# Altium PCB B293A MiRLIN Integrated PIC32.PcbDoc (part 1 of 3)
Units mm, origin at the board's own origin, x right, y up, seen from the top; angles counter-clockwise.
Board outline 134.25 x 90.25 mm, 4 copper layers (Component Side, Ground Plane, Power Plane, Solder Side), stack 0.651 mm thick; 223 components, 154 nets, 813 pads, 160 vias.
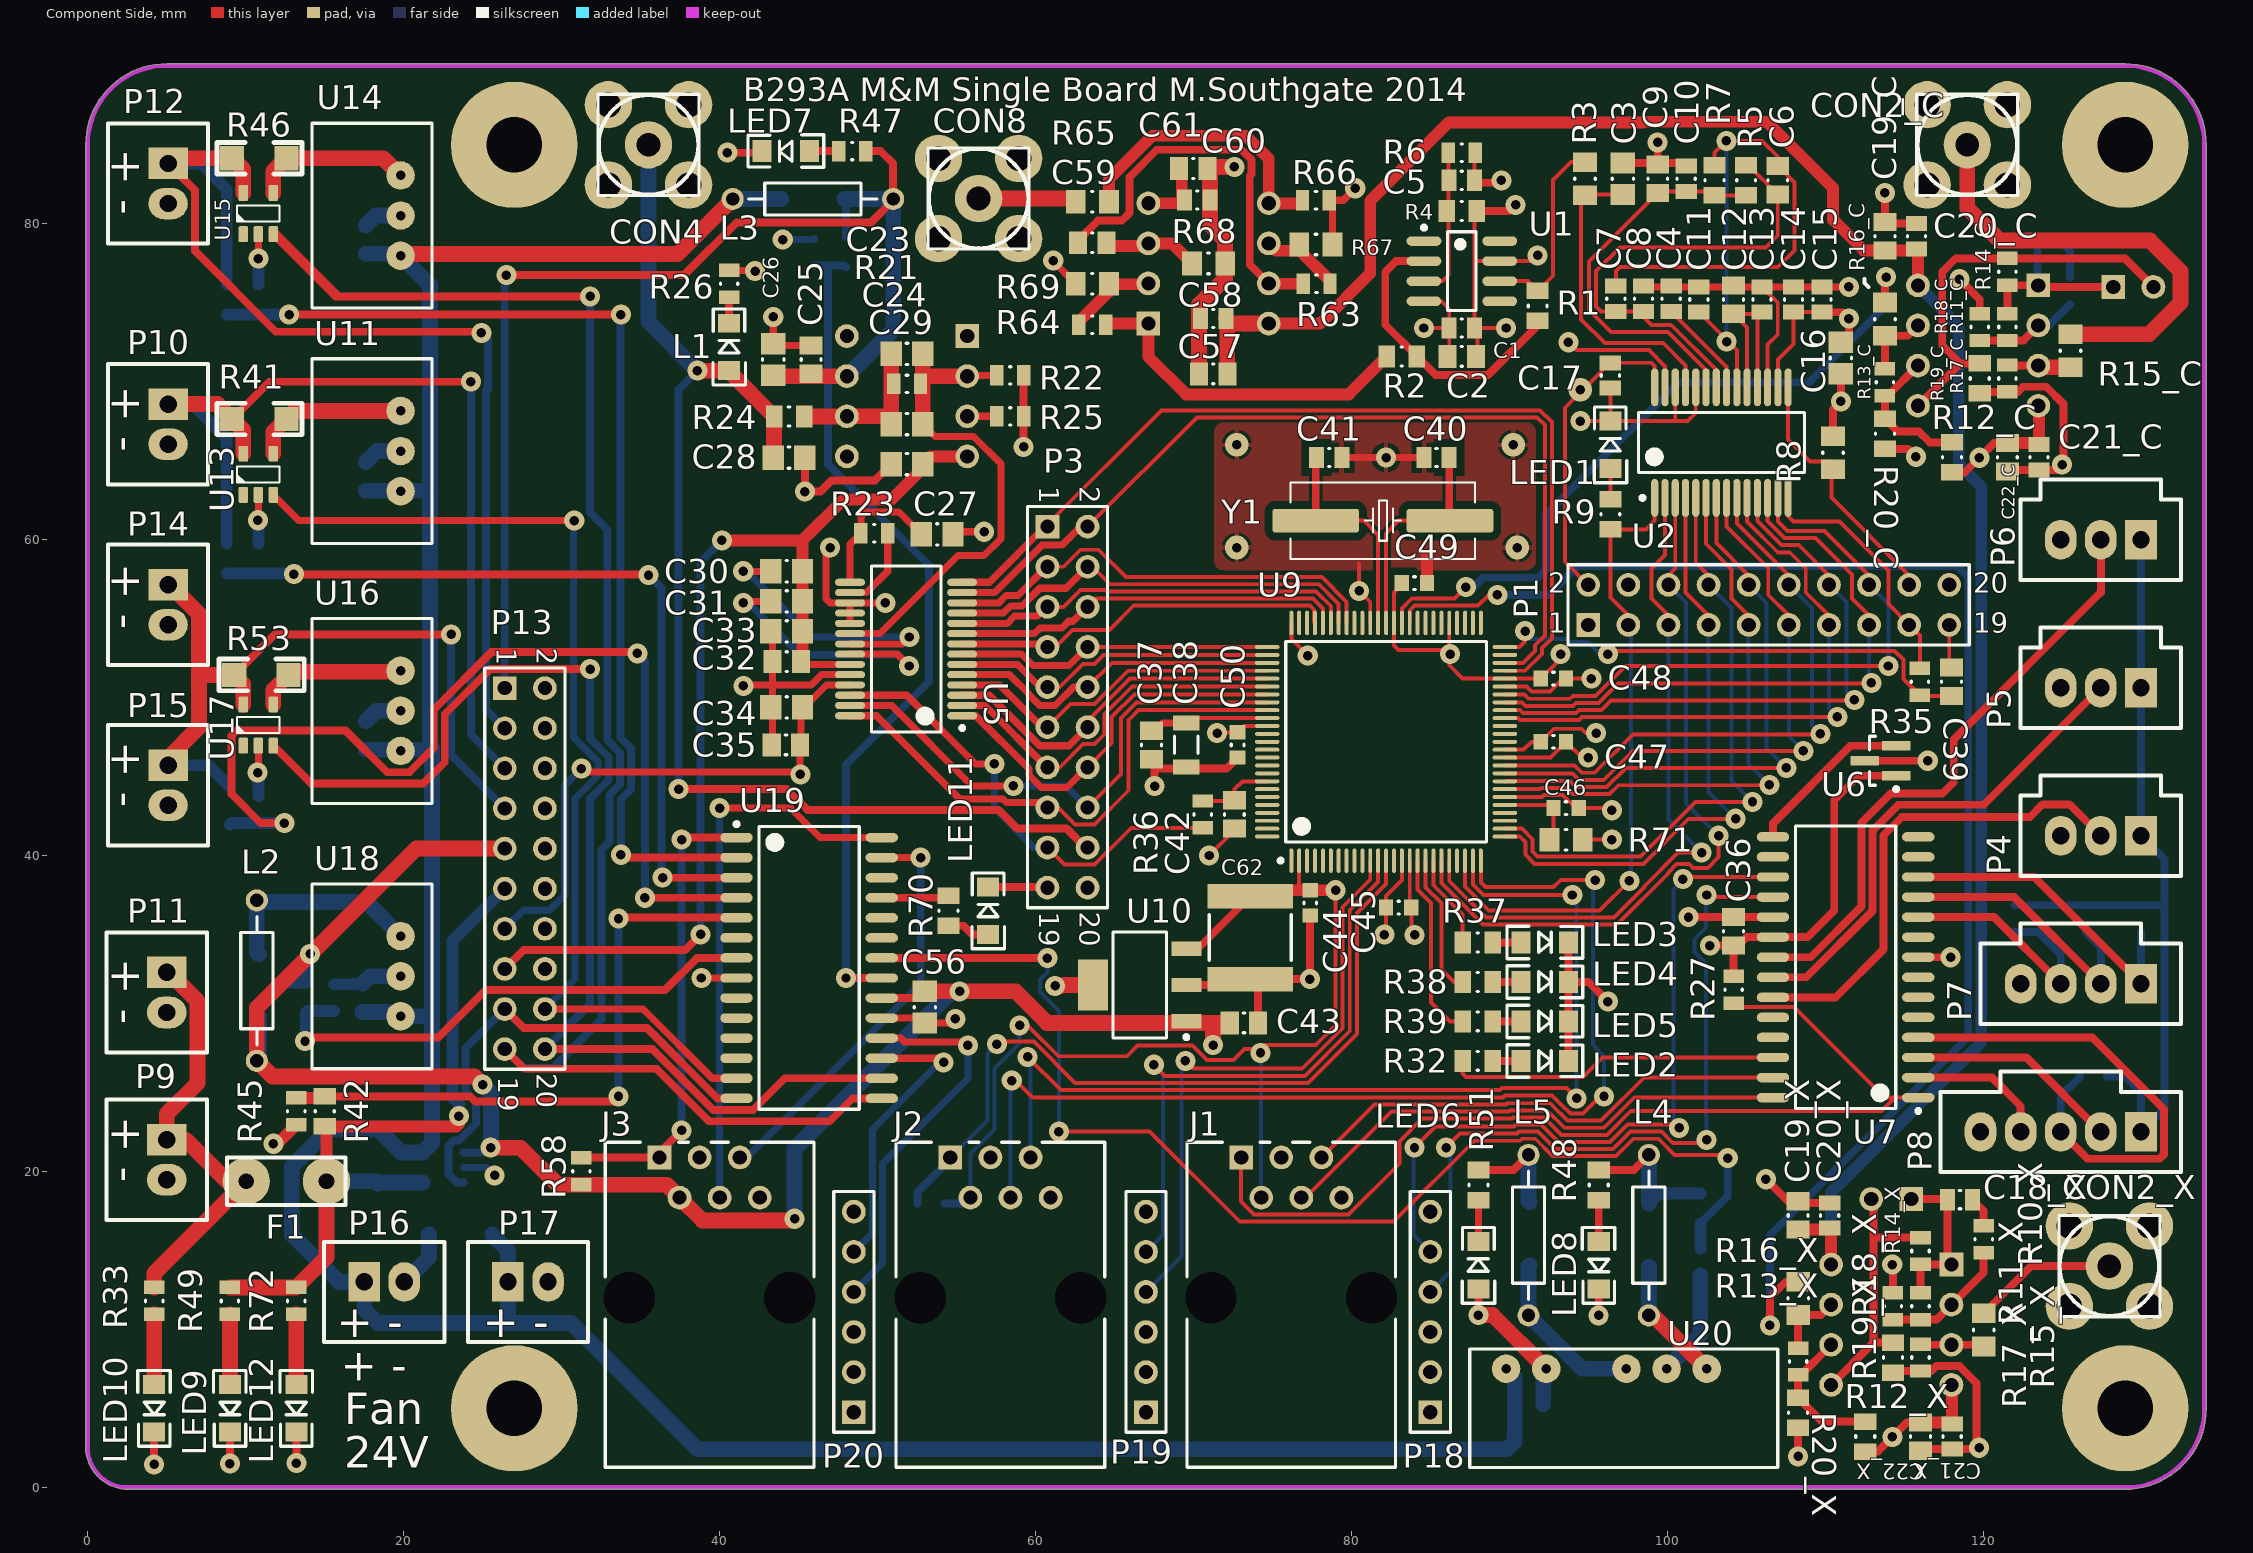
[diagram p0: Component Side view]
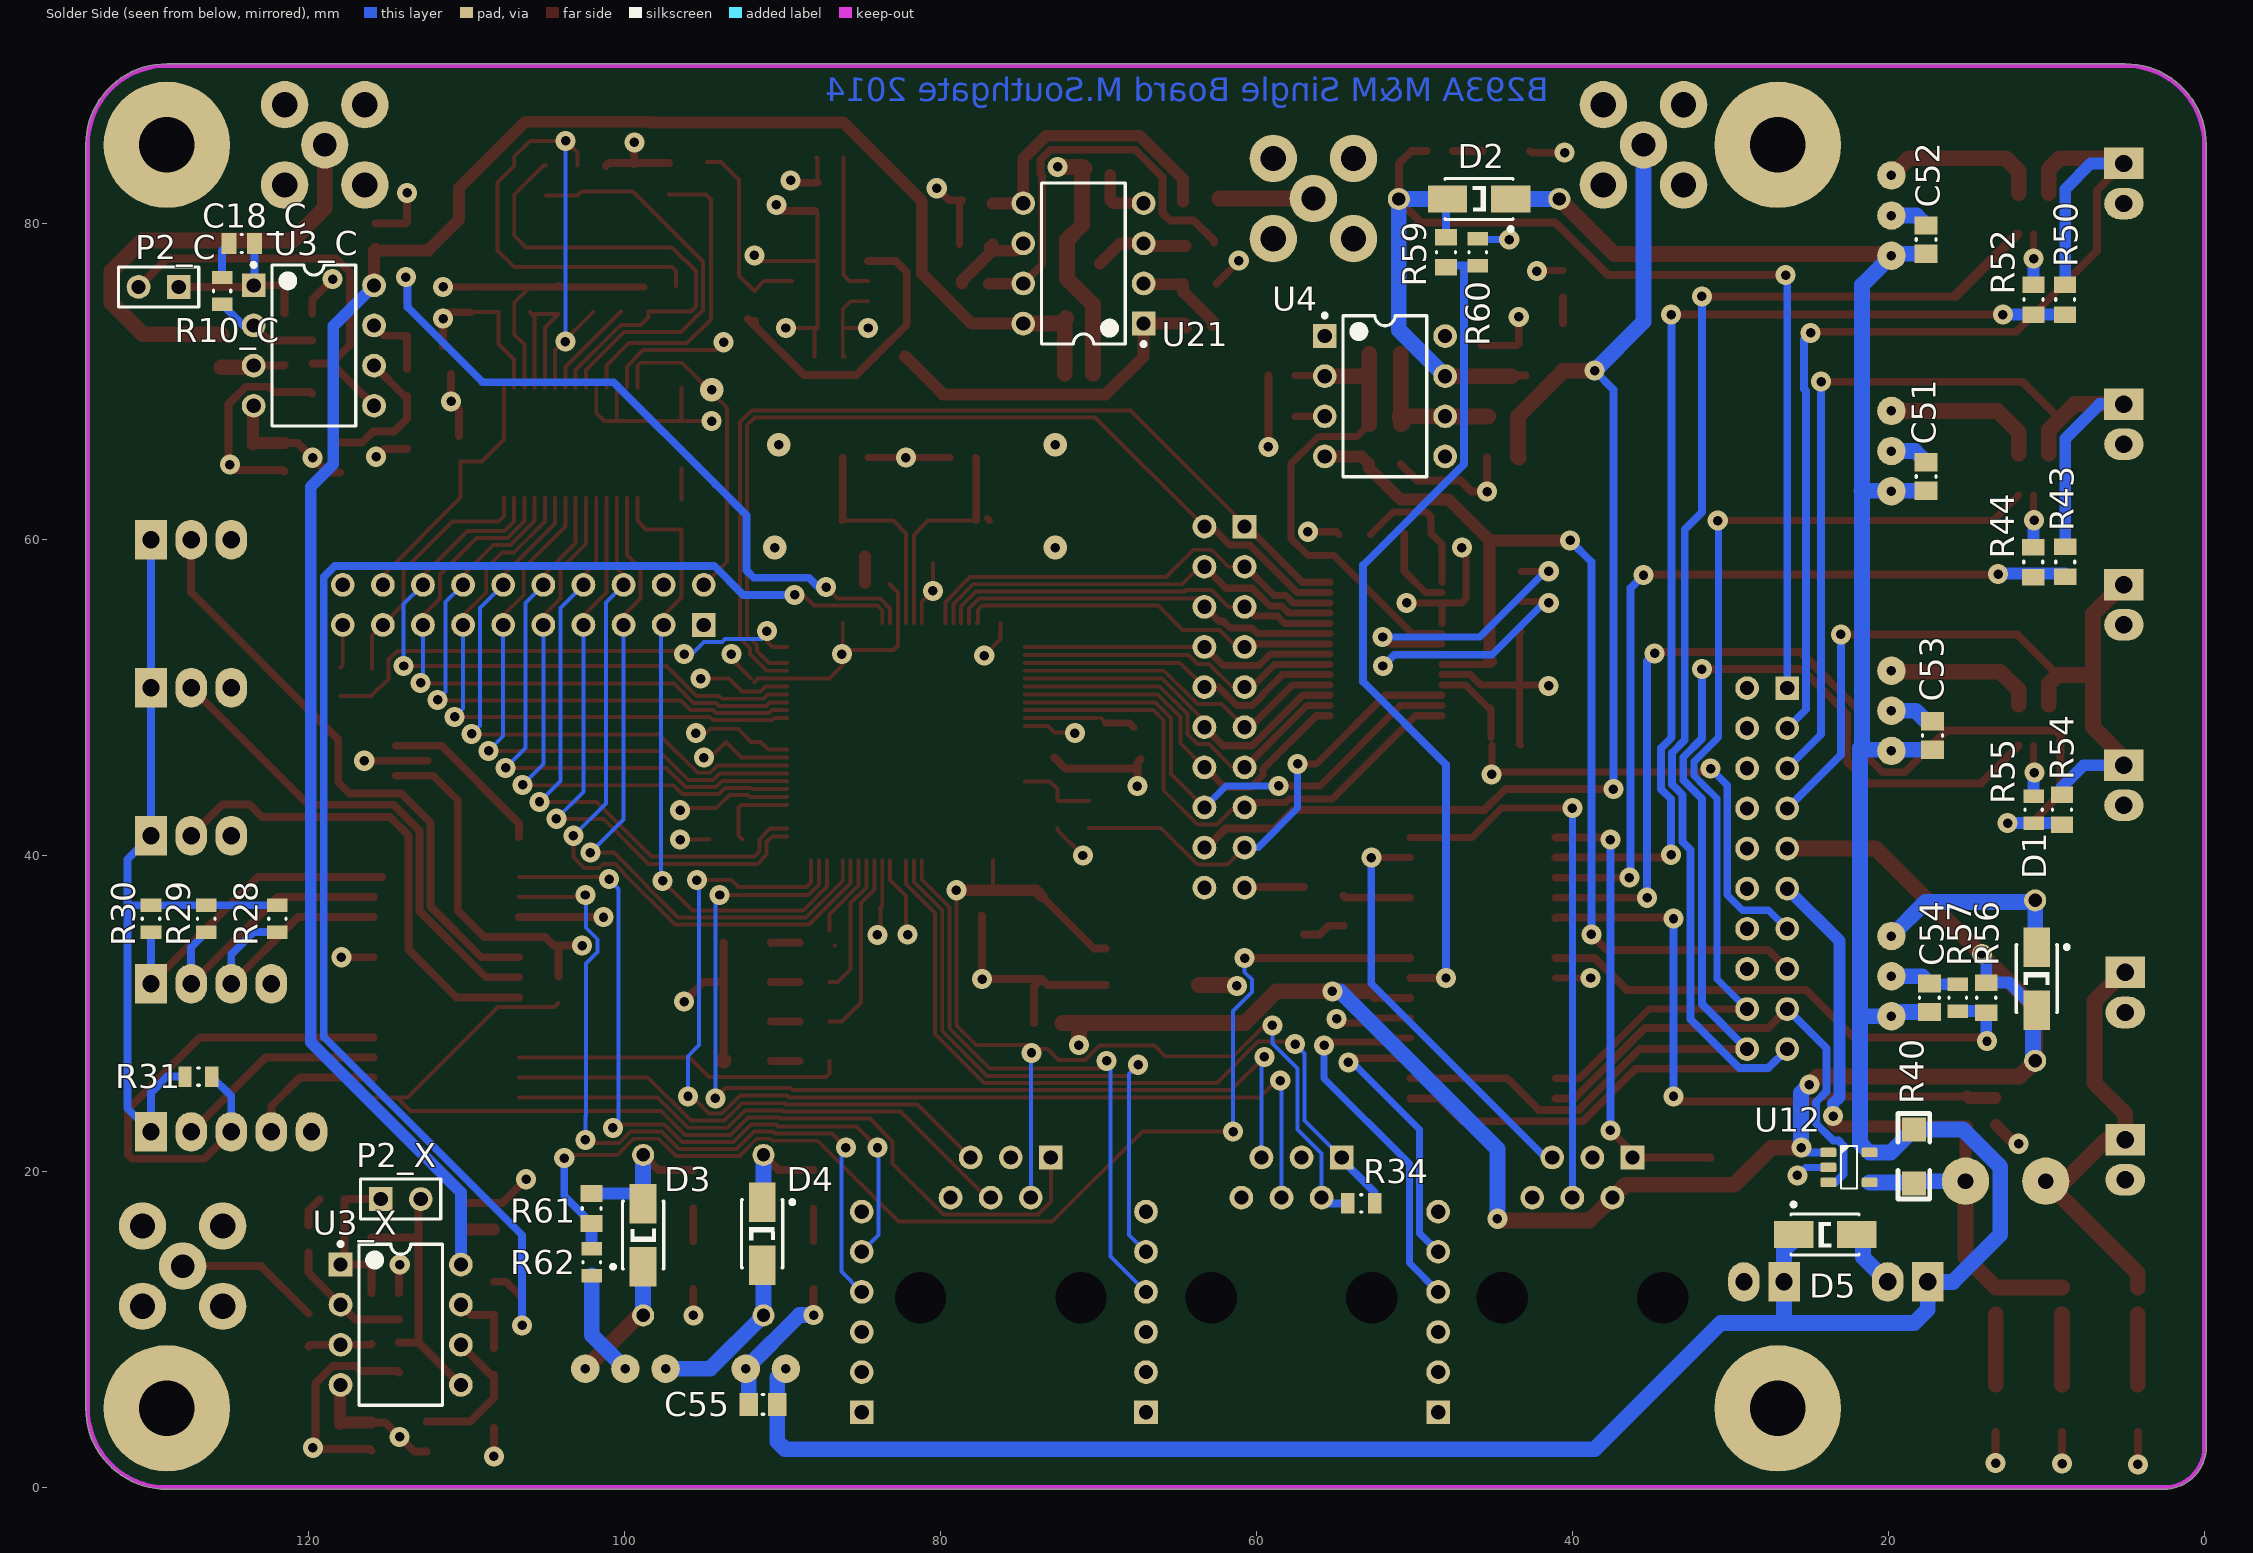
[diagram p1: Solder Side view, seen from below]
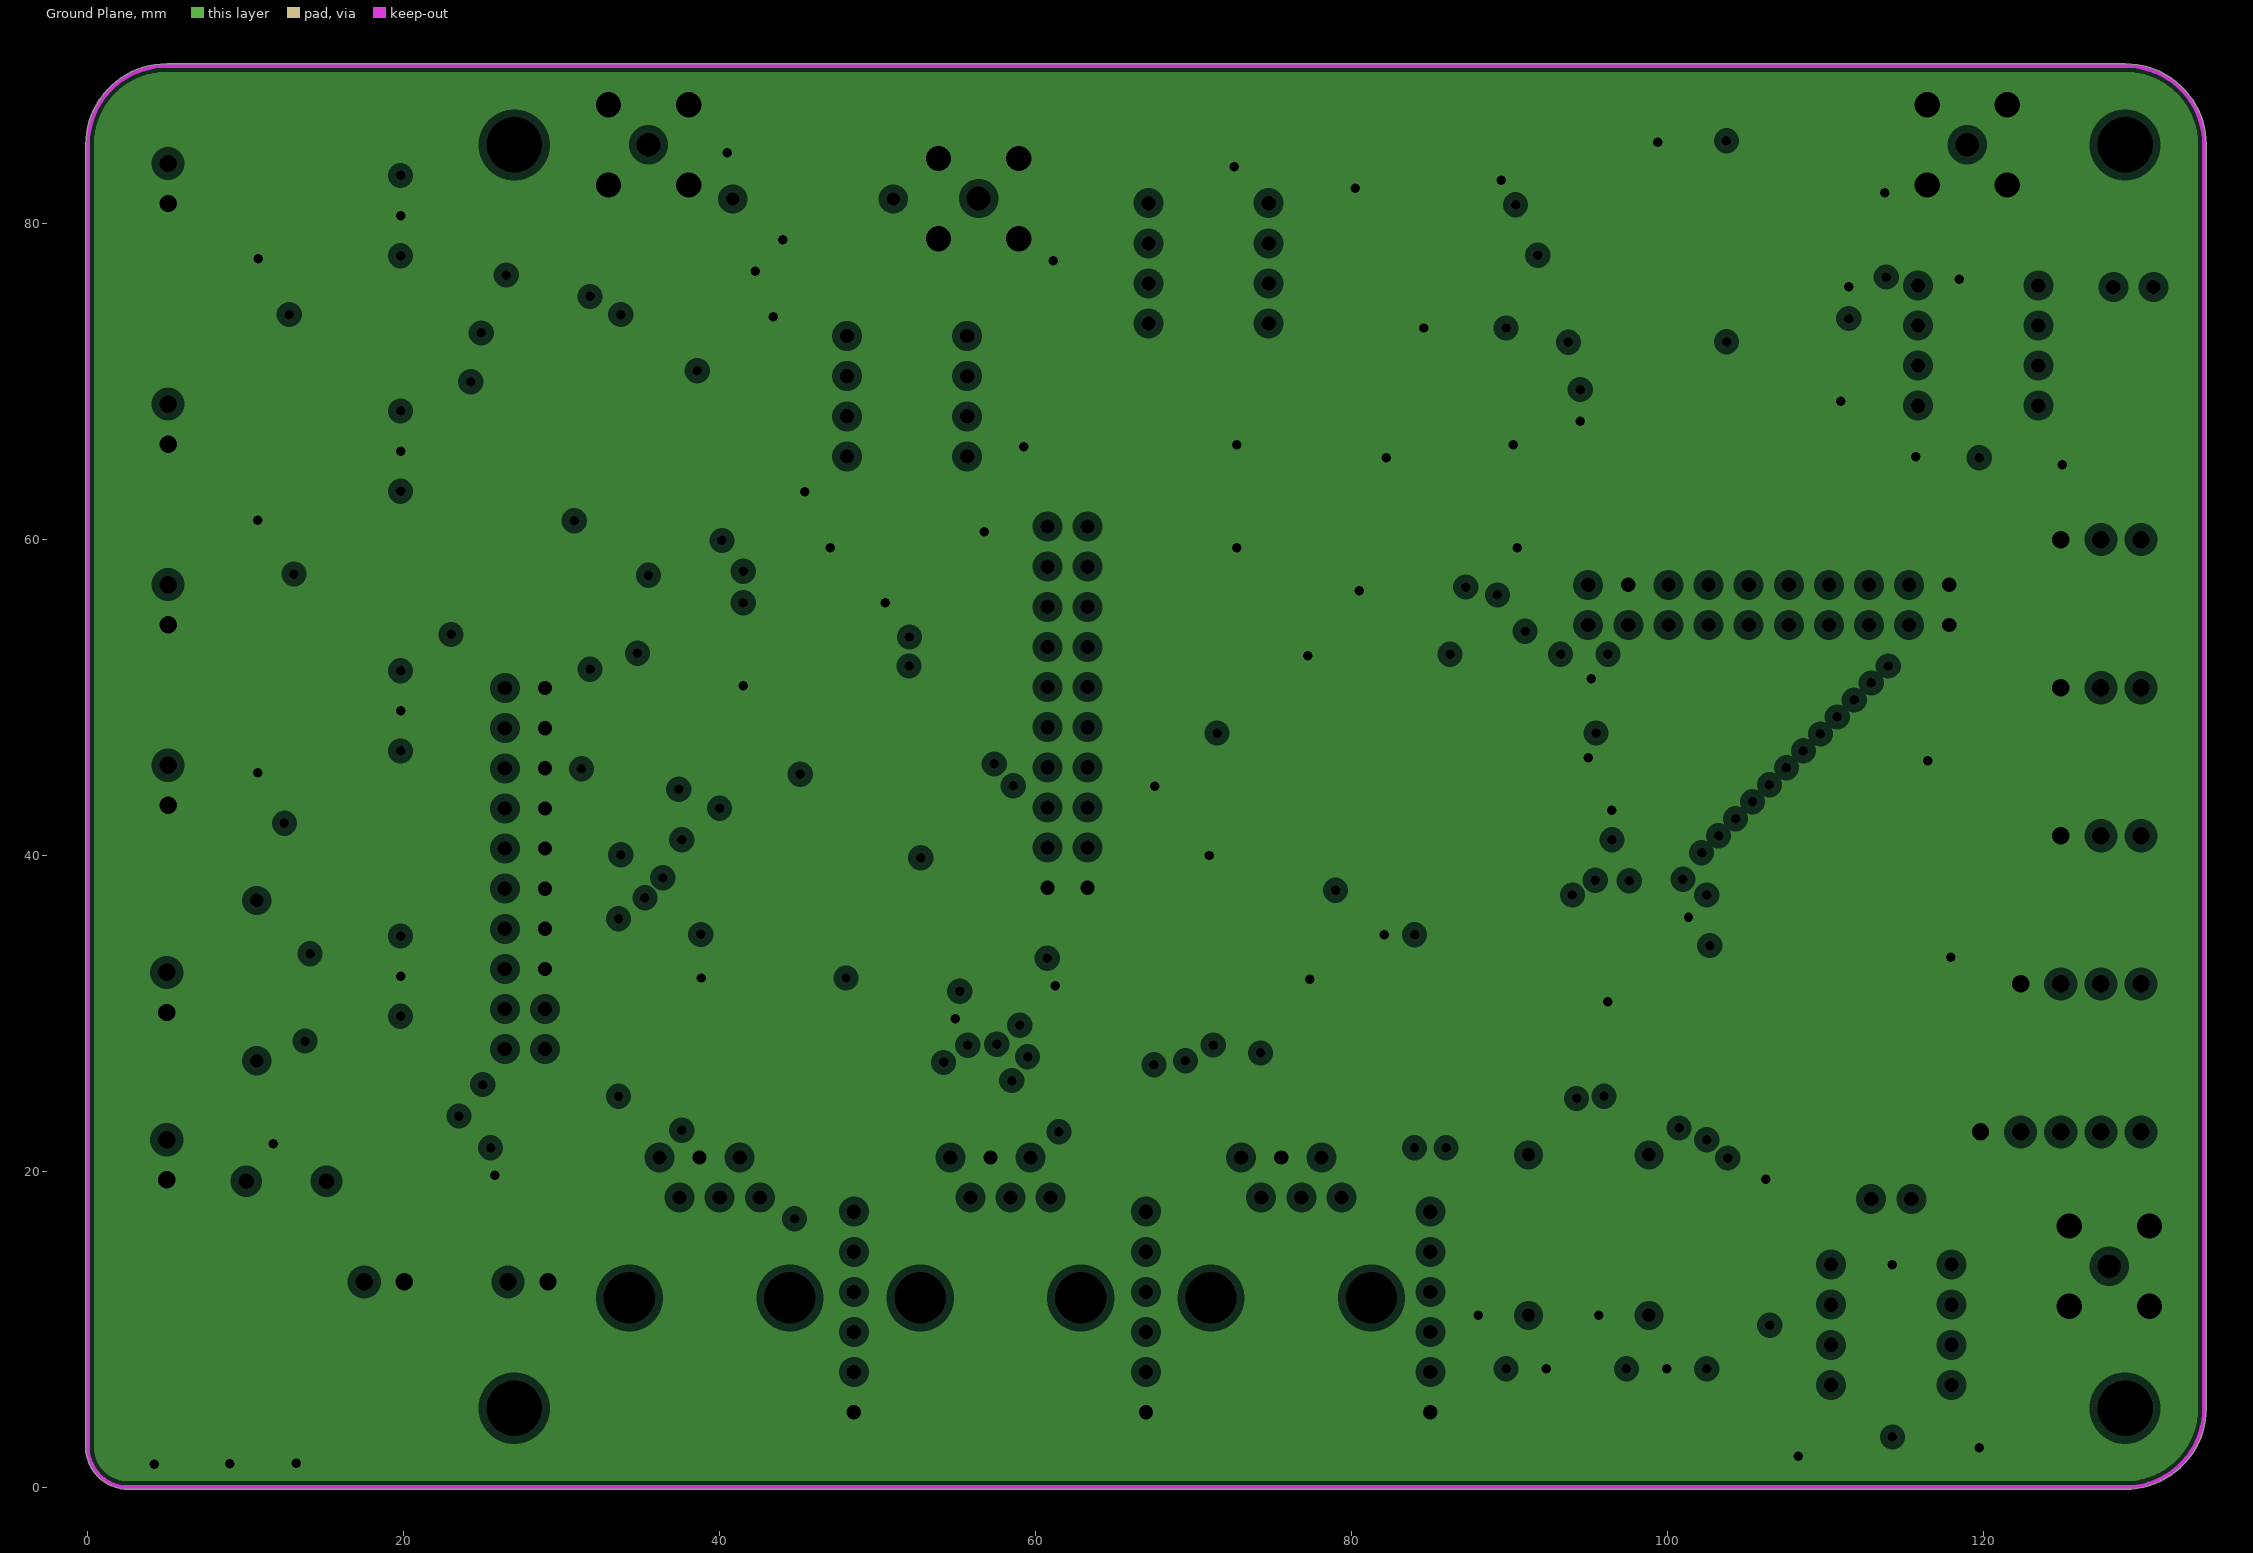
[diagram p2: Ground Plane, clearances drawn from the general rule]
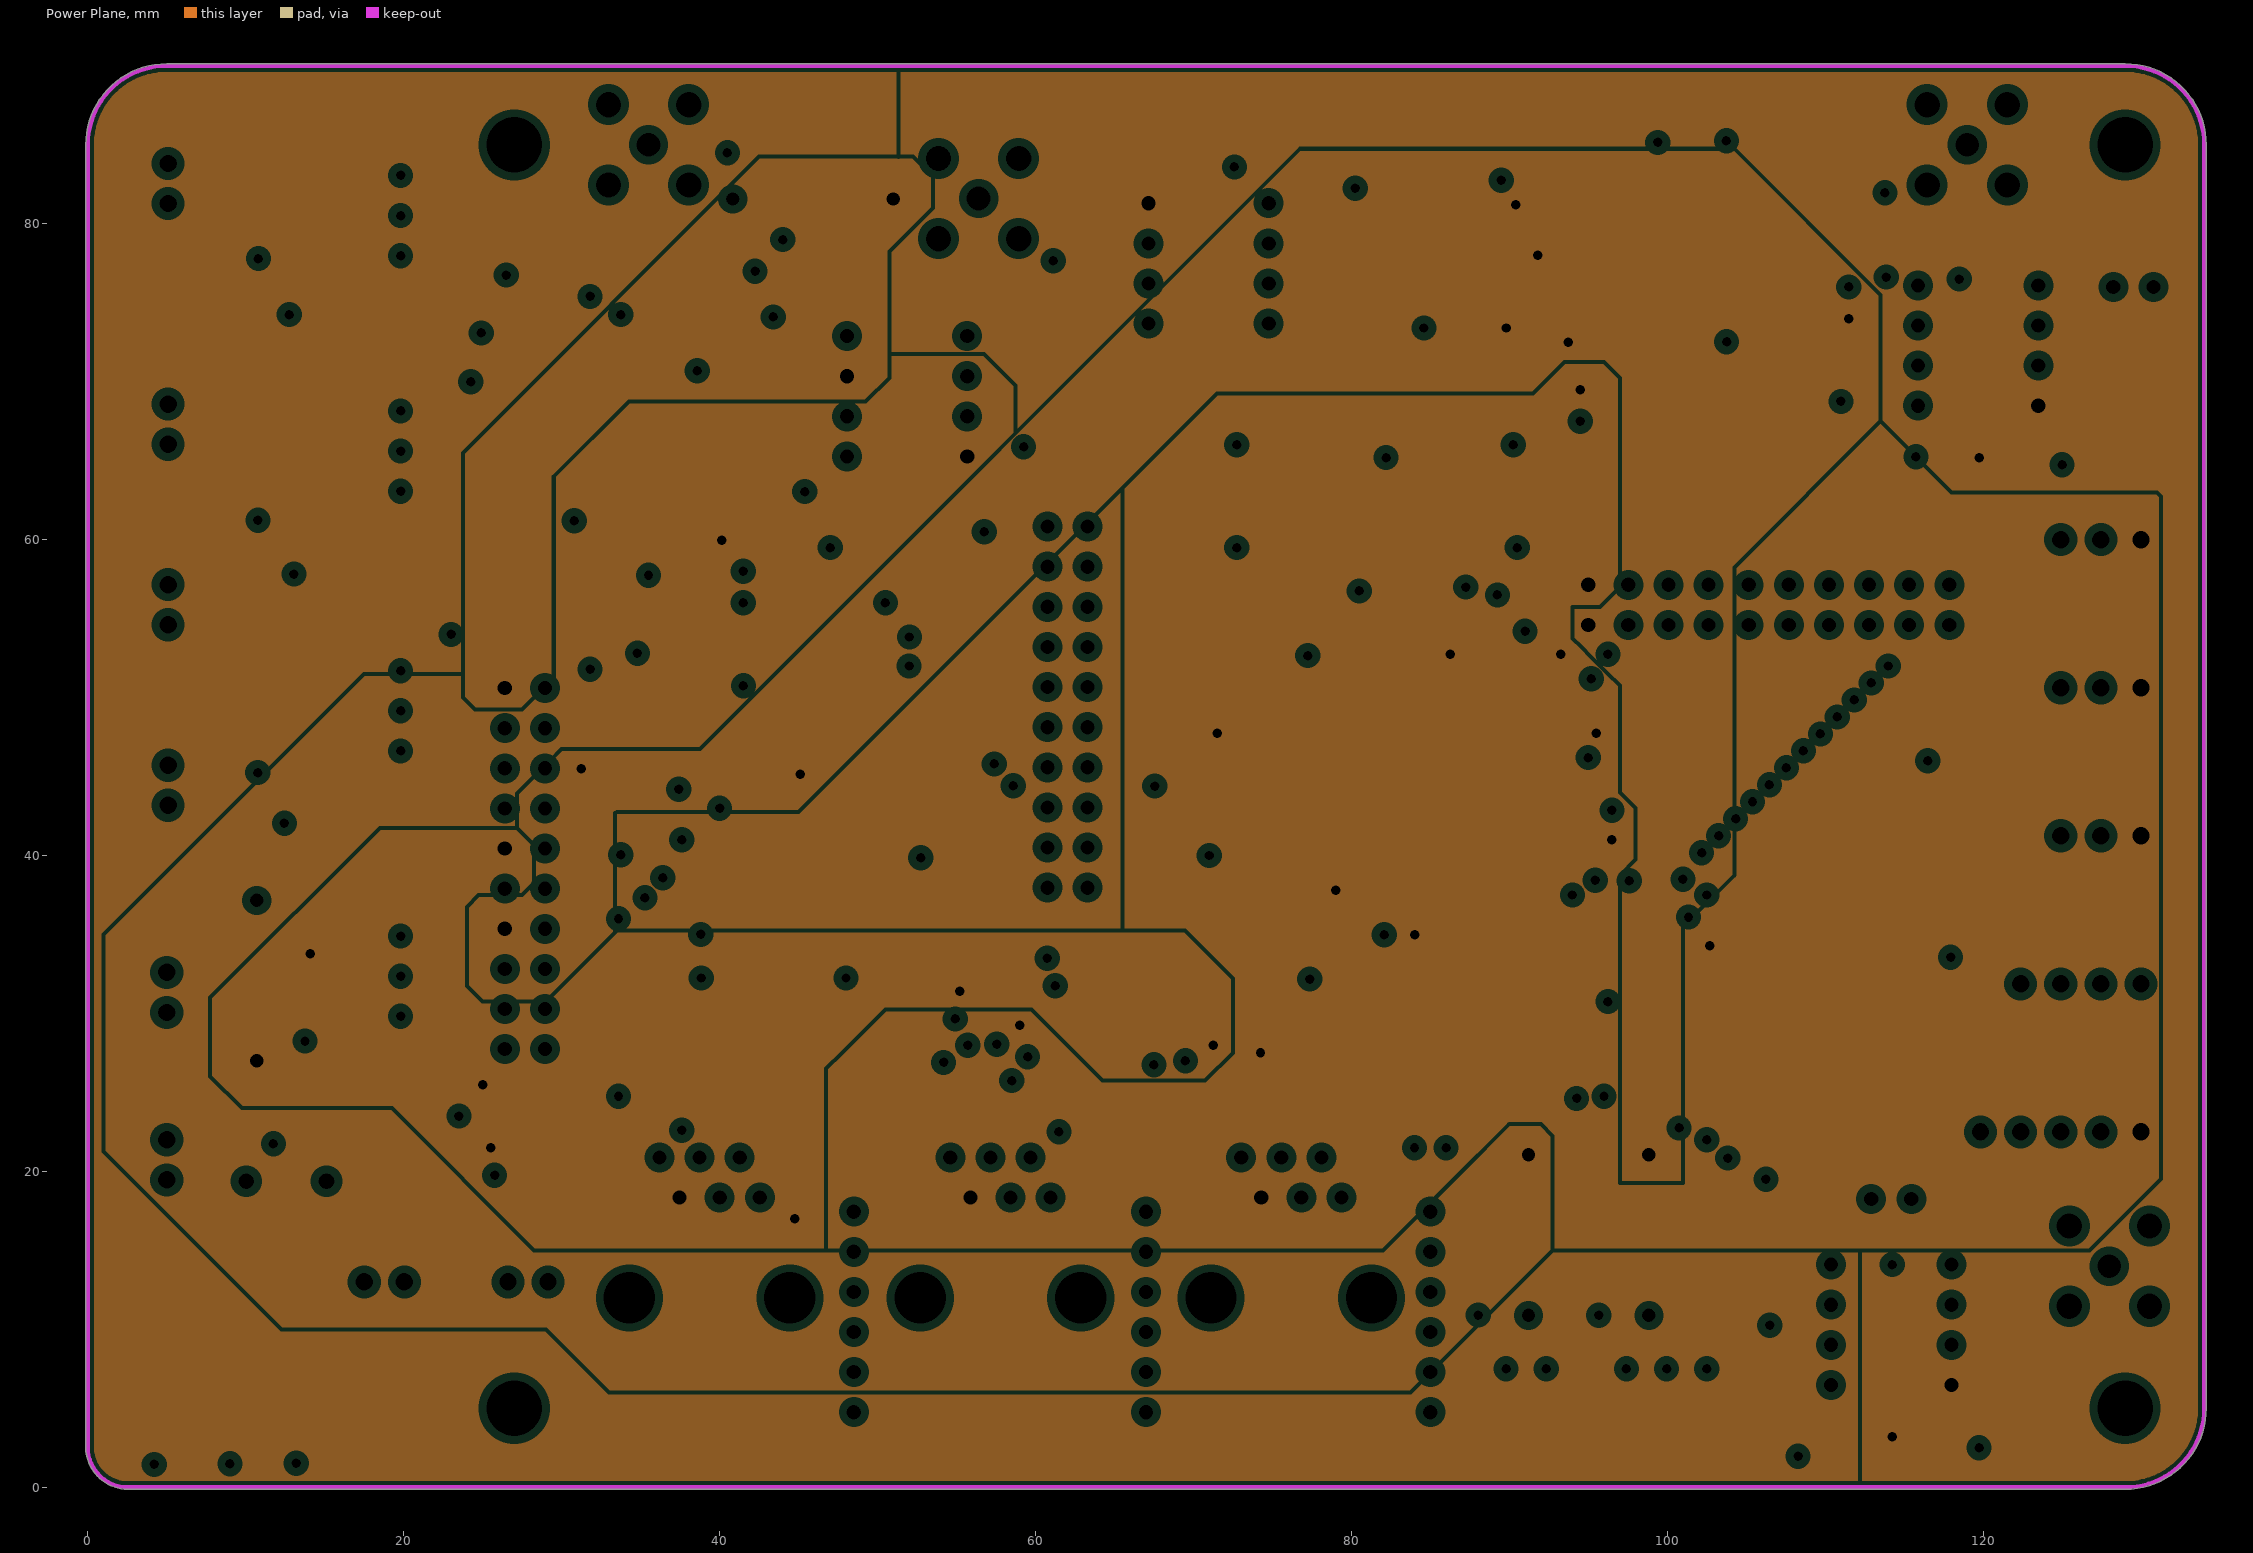
[diagram p3: Power Plane, clearances drawn from the general rule]

## Layer stack, top to bottom
Top Solder: solder mask 0.0102, Solder Resist, Dk 3.5
Component Side: signal copper 0.0356
Dielectric 1: prepreg 0.127, FR-4, Dk 4.2
Ground Plane: plane copper 0.036, net VSS
Dielectric 3: core 0.254, Dk 4.2
Power Plane: plane copper 0.036, net (Multiple Nets)
Dielectric 4: prepreg 0.127, Dk 4.2
Solder Side: signal copper 0.0356
Bottom Solder: solder mask 0.0102, Solder Resist, Dk 3.5

## Board outline
-0.127,2.54 -0.127,85 cw(c0,85) -0.127,85.001 cw(c5,85) 5,90.127 129,90.127 cw(c129,85) 134.127,85.001 cw(c134,85) 134.127,85 cw(c134,85) 134.127,84.999 134.127,85 ccw(c129,85) 134.127,85.001 ccw(c129,85) 134.127,85.001 134.127,85 134.127,5 cw(c129,5) 129.001,-0.127 cw(c129,0) 129,-0.127 2.54,-0.127 cw(c2.54,2.54)

## Design rules (kind name [scope] priority, off if disabled: settings)
Clearance "Mechanical Clearance" [InPoly vs OnLayer('Keep-Out Layer')] p1: gap=0.5
Clearance "Polygon Clearance" [InPolygon vs IsPad] p2: gap=0.5
Clearance [All] p3: gap=0.2
ComponentClearance [All] p1: gap=0 collisioncheckmode=3 verticalgap=0.254 showdistances=FALSE
FabricationTestPointUsage TestPointUsage [All] p1: valid=0 allowmultiple=FALSE
FabricationTestpoint Testpoint [All] p1: side=3 testpointundercomponent=TRUE minsize=1.016 maxsize=2.54 preferedsize=1.524 minholesize=0 maxholesize=1.016 preferedholesize=0.813 testpointgrid=0.025 allowsidetop=TRUE allowsidebottom=TRUE usegrid=TRUE gridtolerance=0
HoleSize [All] p1: absolutevalues=TRUE maxlimit=6 minlimit=0.3 maxpercent=80.000 minpercent=20.000
HoleToHoleClearance [All] p1: gap=0.25 allowstackedmicrovias=TRUE
MinimumAnnularRing [All] p1: minimumring=0.15
MinimumSolderMaskSliver [All] p1: minsoldermaskwidth=0.1
PlaneClearance [All] p1: clearance=0.5
PlaneConnect [All] p1: planeconnectstyle=Relief reliefexpansion=0.5 reliefentries=4 reliefconductorwidth=0.3 reliefairgap=0.3
PolygonConnect [All] p1: connectstyle=Relief reliefconductorwidth=0.3 reliefentries=4 polygonreliefangle="90 Angle" airgapwidth=0.3
RoutingTopology [All] p1: topology=Daisy_Balanced
RoutingVias [All] p1: holewidth=0.6 width=1.5 viastyle="Through Hole" minholewidth=0.35 minwidth=0.7 maxholewidth=0.6 maxwidth=1.8
SilkToBoardRegionClearance SilkToBoardRegionClearance_1 [All] p1:
SilkToSilkClearance [All] p1: silktosilkclearance=0.1
SilkToSolderMaskClearance [IsPad] p1: minsilkscreentomaskgap=0.15 clearancetoexposedcopper=TRUE
SolderMaskExpansion [All] p1: expansion=0.125
Width [All] p1: maxlimit=3 minlimit=0.2 preferedwidth=1 minimp=50.000000 maximp=50.000000 favimp=50.000000
17 further rules are at their usual default settings.

## Classes and differential pairs
component class C: C18_C C19_C C20_C C21_C C22_C CON2_C P2_C R10_C R11_C R12_C R13_C R14_C R15_C R16_C R17_C R18_C R19_C R20_C U3_C
component class "U_B293A ADC": C1 C2 C3 C4 C5 C6 C7 C8 C9 C10 C11 C12 C13 C14 C15 C16 C17 LED1 P1 R1 R2 R3 R4 R5 R6 R7 R8 R9 U1 U2
component class "U_B293A DAC": C23 C24 C25 C26 C27 C28 C29 C30 C31 C32 C33 C34 C35 CON4 L1 P3 R21 R22 R23 R24 R25 R26 U4 U5
component class "U_B293A Monitor": C36 J1 LED2 P4 P5 P6 P7 P8 P18 R27 R28 R29 R30 R31 R32 U6 U7
component class "U_B293A PIC32": C37 C38 C39 C40 C41 C42 C43 C44 C45 C46 C47 C48 C49 C50 C62 J2 LED3 LED4 LED5 P19 R34 R35 R36 R37 R38 R39 R71 U9 U10 Y1
component class "U_B293A PSU": C51 C52 C53 C54 C55 C56 D1 D2 D3 D4 D5 F1 J3 L2 L3 L4 L5 LED6 LED7 LED8 LED9 LED10 LED11 LED12 P9 P10 P11 P12 P13 P14 P15 P16 P17 P20 R33 R40 R41 R42 R43 R44 R45 R46 R47 R48 R49 R50 R51 R52 R53 R54 R55 R56 R57 R58 R59 R60 R61 R62 R70 R72 U11 U12 U13 U14 U15 U16 U17 U18 U19 U20
component class "U_B293A Z Amp": C57 C58 C59 C60 C61 CON8 R63 R64 R65 R66 R67 R68 R69 U21
component class X: C18_X C19_X C20_X C21_X C22_X CON2_X P2_X R10_X R11_X R12_X R13_X R14_X R15_X R16_X R17_X R18_X R19_X R20_X U3_X
net class ADC[11..0]: ADC0 ADC1 ADC2 ADC3 ADC4 ADC5 ADC6 ADC7 ADC8 ADC9 ADC10 ADC11
net class DAC[15..0]: DAC0 DAC1 DAC2 DAC3 DAC4 DAC5 DAC6 DAC7 DAC8 DAC9 DAC10 DAC11 DAC12 DAC13 DAC14 DAC15
channel class "B293A CoX Amp": C X

## Components (designator, comment, footprint, x,y, rotation, side; value= is the part's Value field where it differs from the comment)
C1 "CAP 100nF 50V 0805(2012)" CAPC0805(2012)75_L 87,73.4 r0 top
C2 "CAP 10uF 25V 0805(2012)" CAPC0805(2012)145_N#1 87,71.6 r0 top
C3 "CAP 1.5nF 50V 0805(2012)" CAPC0805(2012)75_M 97.2,82.85 r270 top
C4 "CAP 100nF 50V 0805(2012)" CAPC0805(2012)75_L 100.25,75.25 r270 top
C5 "CAP 100nF 50V 0805(2012)" CAPC0805(2012)75_L 87,82.75 r180 top
C6 "CAP 10uF 25V 0805(2012)" CAPC0805(2012)145_N#1 107,82.75 r270 top
C7 "CAP 100nF 50V 0805(2012)" CAPC0805(2012)75_L 96.75,75.25 r270 top
C8 "CAP 100nF 50V 0805(2012)" CAPC0805(2012)75_L 98.5,75.25 r270 top
C9 "CAP 10uF 25V 0805(2012)" CAPC0805(2012)145_N#1 99.4,82.85 r270 top
C10 "CAP 100nF 50V 0805(2012)" CAPC0805(2012)75_L 101.2,82.85 r270 top
C11 "CAP 100nF 50V 0805(2012)" CAPC0805(2012)75_L 102,75.2 r270 top
C12 "CAP 10uF 25V 0805(2012)" CAPC0805(2012)145_N#1 104.2,75.2 r270 top
C13 "CAP 100nF 50V 0805(2012)" CAPC0805(2012)75_L 106,75.2 r270 top
C14 "CAP 100nF 50V 0805(2012)" CAPC0805(2012)75_L 108,75.2 r270 top
C15 "CAP 100nF 50V 0805(2012)" CAPC0805(2012)75_L 109.8,75.2 r270 top
C16 "CAP 2.2uF 50V 0805(2012)" CAPC0805(2012)145_M 111,71.5 r90 top
C17 "CAP 100nF 50V 0805(2012)" CAPC0805(2012)75_L 96.4,70.4 r270 top
C18_C "CAP 47pF 50V 0805(2012)" CAPC0805(2012)75_L 124.25,78.75 r0 bottom (schematic designator C18)
C18_X "CAP 47pF 50V 0805(2012)" CAPC0805(2012)75_L 118.54,18.21 r0 top (schematic designator C18)
C19_C "CAP 10uF 25V 0805(2012)" CAPC0805(2012)145_N#1 113.79,79.21 r270 top (schematic designator C19)
C19_X "CAP 10uF 25V 0805(2012)" CAPC0805(2012)145_N#1 108.29,17.21 r270 top (schematic designator C19)
C20_C "CAP 10nF 25V 0805(2012)" CAPC0805(2012)75_L 115.79,79.21 r270 top (schematic designator C20)
C20_X "CAP 10nF 25V 0805(2012)" CAPC0805(2012)75_L 110.29,17.21 r270 top (schematic designator C20)
C21_C "CAP 10nF 25V 0805(2012)" CAPC0805(2012)75_L 123.54,65.21 r90 top (schematic designator C21)
C21_X "CAP 10nF 25V 0805(2012)" CAPC0805(2012)75_L 118.04,3.21 r90 top (schematic designator C21)
C22_C "CAP 10uF 25V 0805(2012)" CAPC0805(2012)145_N#1 121.54,65.21 r90 top (schematic designator C22)
C22_X "CAP 10uF 25V 0805(2012)" CAPC0805(2012)145_N#1 116.04,3.21 r90 top (schematic designator C22)
C23 "CAP 4.7nF 50V 0805(2012)" CAPC0805(2012)75_M 51.87,71.765 r0 top
C24 "CAP 470pF 50V 0805(2012)" CAPC0805(2012)100_M 51.87,67.32 r0 top
C25 "CAP 10uF 25V 0805(2012)" CAPC0805(2012)145_N#1 45.8,71.4 r270 top
C26 "CAP 100nF 50V 0805(2012)" CAPC0805(2012)100_M 43.4,71.4 r90 top
C27 "CAP 100nF 50V 0805(2012)" CAPC0805(2012)100_M 53.775,60.335 r180 top
C28 "CAP 100nF 50V 0805(2012)" CAPC0805(2012)100_M 44.4,65.2 r0 top
C29 "CAP 100nF 50V 0805(2012)" CAPC0805(2012)100_M 51.87,64.78 r0 top
C30 "CAP 100nF 50V 0805(2012)" CAPC0805(2012)100_M 44.25,57.995 r180 top
C31 "CAP 100nF 50V 0805(2012)" CAPC0805(2012)100_M 44.25,56.09 r180 top
C32 "CAP 10uF 25V 0805(2012)" CAPC0805(2012)145_N#1 44.25,52.28 r180 top
C33 "CAP 100nF 50V 0805(2012)" CAPC0805(2012)100_M 44.25,54.185 r0 top
C34 "CAP 100nF 50V 0805(2012)" CAPC0805(2012)100_M 44.25,49.375 r0 top
C35 "CAP 10uF 25V 0805(2012)" CAPC0805(2012)145_N#1 44.2,47 r0 top
C36 "CAP 120nF 50V 0805(2012)" CAPC0805(2012)145_N#1 104.2,35.2 r90 top
C37 "CAP 10uF 25V 0805(2012)" CAPC0805(2012)145_N#1 67.35,47 r270 top
C38 "CAP 100nF 50V 1206(3216)" CAPC1206(3216)170_L 69.55,47 r270 top
C39 "CAP 1uF 25V 0805(2012)" CAPC0805(2012)100_N 118,51 r90 top
C40 "CAP 15pF 50V 0805(2012)" CAPC0805(2012)75_L 85.4,65.2 r0 top
C41 "CAP 15pF 50V 0805(2012)" CAPC0805(2012)75_L 78.6,65.2 r180 top
C42 "CAP 1uF 25V 0805(2012)" CAPC0805(2012)100_N 72.6,42.6 r270 top
C43 "CAP 10uF 25V 0805(2012)" CAPC0805(2012)145_N#1 73.2,29.4 r0 top
C44 "CAP 100nF 50V 0603(1608)" CAPC0603(1608)100_N 77.4,37 r270 top
C45 "CAP 100nF 50V 0603(1608)" CAPC0603(1608)100_N 83,36.7 r180 top
C46 "CAP 100nF 50V 0603(1608)" CAPC0603(1608)100_N 93.6,43 r0 top
C47 "CAP 100nF 50V 0603(1608)" CAPC0603(1608)100_N 92.8,47.2 r0 top
C48 "CAP 100nF 50V 0603(1608)" CAPC0603(1608)100_N 92.8,51.2 r0 top
C49 "CAP 100nF 50V 0603(1608)" CAPC0603(1608)100_N 84,57.25 r0 top
C50 "CAP 100nF 50V 0603(1608)" CAPC0603(1608)100_N 72.8,47 r270 top
C51 "CAP 10uF 25V 0805(2012)" CAPC0805(2012)145_N#2 17.6,64 r90 bottom
C52 "CAP 10uF 25V 0805(2012)" CAPC0805(2012)145_N#2 17.6,79 r90 bottom
C53 "CAP 10uF 25V 0805(2012)" CAPC0805(2012)145_N#2 17.2,47.6 r90 bottom
C54 "CAP 10uF 25V 0805(2012)" CAPC0805(2012)145_N#2 17.4,31 r90 bottom
C55 "CAP 10uF 25V 0805(2012)" CAPC0805(2012)145_N#1 91.25,5.25 r180 bottom
C56 "CAP 100nF 50V 0805(2012)" CAPC0805(2012)100_M 53,30.4 r270 top
C57 "CAP 10uF 25V 0805(2012)" CAPC0805(2012)145_N#1 71.25,70.5 r0 top
C58 "CAP 10nF 25V 0805(2012)" CAPC0805(2012)75_L 71.25,74 r0 top
C59 "CAP 1nF 50V 0805(2012)" CAPC0805(2012)75_N 63.6,78.8 r180 top
C60 "CAP 10nF 25V 0805(2012)" CAPC0805(2012)75_L 70.25,81.5 r180 top
C61 "CAP 10uF 25V 0805(2012)" CAPC0805(2012)145_N#1 70,83.5 r180 top
C62 "CAP 47uF 25V 2220(5750)" CAPC2220(5750)230_N 73.6,34.8 r90 top
CON2_C "SMA Vertical" "SMA Vertical" 119,85 r0 top (schematic designator CON2)
CON2_X "SMA Vertical" "SMA Vertical" 128,14 r0 top (schematic designator CON2)
CON4 "SMA Vertical" "SMA Vertical" 35.5,85 r270 top
CON8 "SMA Vertical" "SMA Vertical" 56.4,81.6 r90 top
D1 "S1M-13-F" DIOD-S1M-13-F-SMA-2_V 10.6,32.2 r90 bottom
D2 "S1M-13-F" DIOD-S1M-13-F-SMA-2_V 45.91,81.57 r180 bottom
D3 "S1M-13-F" DIOD-S1M-13-F-SMA-2_V 98.84,15.96 r270 bottom
D4 "S1M-13-F" DIOD-S1M-13-F-SMA-2_V 91.3,16.05 r90 bottom
D5 "S1M-13-F" DIOD-S1M-13-F-SMA-2_V 24,16 r0 bottom
F1 "0.4A" RXEF040 10.03,19.38 r0 top
J1 "95009-2667" 95009-2667 76.2,1.27 r0 top
J2 "95009-2667" 95009-2667 57.785,1.27 r0 top
J3 "95009-2667" 95009-2667 39.37,1.27 r0 top
L1 "Blue" "1206 - LED" 40.6,72.2 r90 top
L2 "100uH 275mA" AXIAL-0.4 10.7,32.08 r270 top
L3 "100uH 275mA" AXIAL-0.4 45.91,81.57 r0 top
L4 "100uH 275mA" AXIAL-0.4 98.84,15.96 r90 top
L5 "100uH 275mA" AXIAL-0.4 91.22,15.96 r90 top
LED1 "Red" "1206 - LED" 96.4,66 r90 top
LED2 "Green" "1206 - LED" 92.25,27 r0 top
LED3 "Red" "1206 - LED" 92.25,34.5 r0 top
LED4 "Yellow" "1206 - LED" 92.25,32 r0 top
LED5 "Green" "1206 - LED" 92.25,29.5 r0 top
LED6 "Green" "1206 - LED" 88.045,14.055 r90 top
LED7 "Green" "1206 - LED" 44.2,84.6 r180 top
LED8 "Green" "1206 - LED" 95.665,14.055 r270 top
LED9 "Green" "1206 - LED" 9,5 r270 top
LED10 "Green" "1206 - LED" 4.2,5 r270 top
LED11 "Green" "1206 - LED" 57,36.5 r90 top
LED12 "Green" "1206 - LED" 13.2,5 r270 top
P1 "Header 10X2" HDR2X10 95,54.6 r0 top
P2_C "Header 2" HDR1X2 128.25,76 r0 bottom (schematic designator P2)
P2_X "Header 2" HDR1X2 115.46,18.25 r180 bottom (schematic designator P2)
P3 "Header 10X2" HDR2X10 60.76,60.825 r270 top
P4 "MOLEX SL 3W VERT" "MOLEX SL 3W Vertical with latch" 130,41.25 r0 top
P5 "MOLEX SL 3W VERT" "MOLEX SL 3W Vertical with latch" 130,50.625 r0 top
P6 "MOLEX SL 3W VERT" "MOLEX SL 3W Vertical with latch" 130,60 r0 top
P7 "MOLEX SL 4W VERT" "MOLEX SL 4W Vertical with latch" 130,31.875 r0 top
P8 "MOLEX SL 5W VERT" "MOLEX SL 5W Vertical with latch" 130,22.5 r0 top
P9 "MOLEX SL 2W VERT" "MOLEX SL 2W Vertical with latch" 5,22 r90 top
P10 "MOLEX SL 2W VERT" "MOLEX SL 2W Vertical with latch" 5.08,68.58 r90 top
P11 "MOLEX SL 2W VERT" "MOLEX SL 2W Vertical with latch" 5,32.6 r90 top
P12 "MOLEX SL 2W VERT" "MOLEX SL 2W Vertical with latch" 5.08,83.82 r90 top
P13 "Header 10X2" HDR2X10 26.4,50.6 r270 top
P14 "MOLEX SL 2W VERT" "MOLEX SL 2W Vertical with latch" 5.08,57.15 r90 top
P15 "MOLEX SL 2W VERT" "MOLEX SL 2W Vertical with latch" 5.08,45.72 r90 top
P16 "MOLEX SL 2W VERT" "MOLEX SL 2W Vertical with latch" 17.5,13 r180 top
P17 "MOLEX SL 2W VERT" "MOLEX SL 2W Vertical with latch" 26.6,13 r180 top
P18 "Header 6" HDR1X6 85,4.75 r90 top
P19 "Header 6" HDR1X6 67,4.75 r90 top
P20 "Header 6" HDR1X6 48.5,4.75 r90 top
R1 "1K8 5% 0805(2012)" RESC0805(2012)_N 91.8,74.8 r270 top
R2 "1K8 5% 0805(2012)" RESC0805(2012)_N 83.2,71.6 r180 top
R3 "47R 5% 0805(2012)" RESC0805(2012)_M 94.8,82.85 r90 top
R4 "1K8 5% 0805(2012)" RESC0805(2012)_N 87,80.8 r180 top
R5 "1K8 5% 0805(2012)" RESC0805(2012)_N 105,82.75 r90 top
R6 "680R 1% 0805(2012)" RESC0805(2012)_L 87,84.5 r0 top
R7 "1K8 5% 0805(2012)" RESC0805(2012)_N 103,82.75 r270 top
R8 "10K 1% 0805(2012)" RESC0805(2012)_M 110.5,65.5 r90 top
R9 "1K 5% 0805(2012)" RESC0805(2012)_N 96.4,61.6 r270 top
R10_C "1K5 5% 0805(2012)" RESC0805(2012)_L 125.5,75.75 r90 bottom (schematic designator R10)
R10_X "1K5 5% 0805(2012)" RESC0805(2012)_L 120.04,15.71 r90 top (schematic designator R10)
R11_C "100K 5% 0805(2012)" RESC0805(2012)_L 121.54,73.46 r90 top (schematic designator R11)
R11_X "100K 5% 0805(2012)" RESC0805(2012)_L 116.04,11.46 r90 top (schematic designator R11)
R12_C "150K 5% 0805(2012)" RESC0805(2012)_N 118.04,65.21 r270 top (schematic designator R12)
R12_X "150K 5% 0805(2012)" RESC0805(2012)_N 112.54,3.21 r270 top (schematic designator R12)
R13_C "10K 5% 0805(2012)" RESC0805(2012)_L 113.79,69.96 r90 top (schematic designator R13)
R13_X "10K 5% 0805(2012)" RESC0805(2012)_L 108.29,7.96 r90 top (schematic designator R13)
R14_C "10K 5% 0805(2012)" RESC0805(2012)_L 121.54,76.96 r270 top (schematic designator R14)
R14_X "10K 5% 0805(2012)" RESC0805(2012)_L 116.04,14.96 r270 top (schematic designator R14)
R15_C "100R 5% 0805(2012)" RESC0805(2012)_M 125.54,71.96 r90 top (schematic designator R15)
R15_X "100R 5% 0805(2012)" RESC0805(2012)_M 120.04,9.96 r90 top (schematic designator R15)
R16_C "100R 5% 0805(2012)" RESC0805(2012)_M 113.79,73.96 r90 top (schematic designator R16)
R16_X "100R 5% 0805(2012)" RESC0805(2012)_M 108.29,11.96 r90 top (schematic designator R16)
R17_C "27K 5% 0805(2012)" RESC0805(2012)_L 121.54,70.21 r90 top (schematic designator R17)
R17_X "27K 5% 0805(2012)" RESC0805(2012)_L 116.04,8.21 r90 top (schematic designator R17)
R18_C "330R 5% 0805(2012)" RESC0805(2012)_L 119.79,73.46 r270 top (schematic designator R18)
R18_X "330R 5% 0805(2012)" RESC0805(2012)_L 114.29,11.46 r270 top (schematic designator R18)
R19_C "1K2 5% 0805(2012)" RESC0805(2012)_N 119.79,70.21 r90 top (schematic designator R19)
R19_X "1K2 5% 0805(2012)" RESC0805(2012)_N 114.29,8.21 r90 top (schematic designator R19)
R20_C "1K2 5% 0805(2012)" RESC0805(2012)_N 113.79,66.71 r90 top (schematic designator R20)
R20_X "1K2 5% 0805(2012)" RESC0805(2012)_N 108.29,4.71 r90 top (schematic designator R20)
R21 "2K2 5% 0805(2012)" RESC0805(2012)_L 51.87,69.86 r180 top
R22 "2K2 5% 0805(2012)" RESC0805(2012)_L 58.4,70.4 r0 top
R23 "2K2 5% 0805(2012)" RESC0805(2012)_L 49.8,60.4 r180 top
R24 "150R 5% 0805(2012)" RESC0805(2012)_N 44.4,67.8 r0 top
R25 "2K2 5% 0805(2012)" RESC0805(2012)_L 58.4,67.8 r180 top
R26 "6K8 5% 0805(2012)" RESC0805(2012)_L 40.6,76.2 r270 top
R27 "10K 5% 0805(2012)" RESC0805(2012)_L 104.2,31.5 r270 top
R28 "10K 5% 0805(2012)" RESC0805(2012)_L 122,36 r90 bottom
R29 "10K 5% 0805(2012)" RESC0805(2012)_L 126.5,36 r90 bottom
R30 "10K 5% 0805(2012)" RESC0805(2012)_L 130,36 r90 bottom
R31 "10K 5% 0805(2012)" RESC0805(2012)_L 127,26 r0 bottom
R32 "1K 5% 0805(2012)" RESC0805(2012)_N 88,27 r180 top
R33 "10K 5% 0805(2012)" RESC0805(2012)_L 4.2,11.8 r90 top
R34 "10K 5% 0805(2012)" RESC0805(2012)_L 53.375,17.975 r180 bottom
R35 "10R 5% 0805(2012)" RESC0805(2012)_L 116,51 r90 top
R36 "220R 5% 0805(2012)" RESC0805(2012)_L 70.6,42.6 r270 top
R37 "1K 5% 0805(2012)" RESC0805(2012)_N 88,34.5 r180 top
R38 "1K 5% 0805(2012)" RESC0805(2012)_N 88,32 r180 top
R39 "1K 5% 0805(2012)" RESC0805(2012)_N 88,29.5 r180 top
R40 "0R1" 1206 18.38,22.66 r270 bottom
R41 "0R022" 1206 12.57,67.64 r180 top
R42 "1K 5% 0805(2012)" RESC0805(2012)_N 15,23.8 r270 top
R43 "1K 5% 0805(2012)" RESC0805(2012)_N 8.797,58.591 r90 bottom
R44 "390R 5% 0805(2012)" RESC0805(2012)_N 10.82,58.579 r270 bottom
R45 "220R 5% 0805(2012)" RESC0805(2012)_L 13.2,23.8 r90 top
R46 "0R022" 1206 12.57,84.15 r180 top
R47 "6K8 5% 0805(2012)" RESC0805(2012)_L 48.4,84.6 r0 top
R48 "1K 5% 0805(2012)" RESC0805(2012)_N 95.665,19.135 r90 top
R49 "10K 5% 0805(2012)" RESC0805(2012)_L 9,11.8 r90 top
R50 "1K 5% 0805(2012)" RESC0805(2012)_N 8.8,75.2 r90 bottom
R51 "1K 5% 0805(2012)" RESC0805(2012)_N 88.045,19.135 r270 top
R52 "1K 5% 0805(2012)" RESC0805(2012)_N 10.8,75.2 r270 bottom
R53 "0R022" 1206 12.7,51.435 r180 top
R54 "1K 5% 0805(2012)" RESC0805(2012)_N 9,42.9 r90 bottom
R55 "10K 5% 0805(2012)" RESC0805(2012)_L 10.8,42.9 r270 bottom
R56 "1K 5% 0805(2012)" RESC0805(2012)_N 13.8,31 r90 bottom
R57 "10K 5% 0805(2012)" RESC0805(2012)_L 15.6,31 r270 bottom
R58 "10K 5% 0805(2012)" RESC0805(2012)_L 31.25,20 r90 top
R59 "1K 5% 0805(2012)" RESC0805(2012)_N 48,78.2 r90 bottom
R60 "220R 5% 0805(2012)" RESC0805(2012)_L 46,78.2 r270 bottom
R61 "1K 5% 0805(2012)" RESC0805(2012)_N 102.1,17.65 r90 bottom
R62 "10K 5% 0805(2012)" RESC0805(2012)_L 102.1,14.25 r90 bottom
R63 "2K2 5% 0805(2012)" RESC0805(2012)_L 77.8,76.2 r180 top
R64 "2K2 5% 0805(2012)" RESC0805(2012)_L 63.6,73.6 r0 top
R65 "100R 5% 0805(2012)" RESC0805(2012)_M 63.6,81.4 r180 top
R66 "27K 5% 0805(2012)" RESC0805(2012)_L 77.76,81.49 r180 top
R67 "100R 5% 0805(2012)" RESC0805(2012)_M 77.76,78.69 r180 top
R68 "3K3 5% 0805(2012)" RESC0805(2012)_M 70.96,77.49 r180 top
R69 "100R 5% 0805(2012)" RESC0805(2012)_M 63.6,76.2 r0 top
R70 "1K 5% 0805(2012)" RESC0805(2012)_N 54.5,36.5 r90 top
R71 "10R 1% 0805(2012)" RESC0805(2012)_M 93.6,41 r0 top
R72 "10K 5% 0805(2012)" RESC0805(2012)_L 13.2,11.8 r90 top
U1 "OPA691IDG4" TI-D8_N 87,77 r0 top
U2 "ADS805EG4" TI-DB28_M 103.435,66.145 r90 top
U3_C "OPA2228PA" TI-P8 119.69,72.29 r180 bottom (schematic designator U3)
U3_X "OPA2228PA" TI-P8 114.19,10.29 r180 bottom (schematic designator U3)
U4 "OP37GPZ" ADI-N-8 51.87,69.08 r180 bottom
U5 "LTC1668" SOP65P800X200-28N 51.81,53.075 r180 top
U6 "MCP9701AT-E/TT" SOT-23-TT3_M 113.5,46 r180 top
U7 "PIC16F1516-E/SO" MCHP-SOIC-SO28_N 111.295,32.925 r180 top
U9 "PIC32MX795F512L-80I/PF" TQFP-PF100_L 82.2,47.2 r90 top
U10 "TC1262-3.3VDB" SOT-223-DB3_L 66.6,31.8 r180 top
U11 "TSR 1-24150" "TSR-1 Series" 21.8,71.45 r270 top
U12 "ZXCT1081" SOT23-5 22.495,20.25 r180 bottom
U13 "ZXCT1022" SOT23-5 10.795,64.135 r90 top
U14 "TSR 1-2490" "TSR-1 Series" 21.8,86.36 r270 top
U15 "ZXCT1022" SOT23-5 10.795,80.645 r90 top
U16 "TSR 1-2450" "TSR-1 Series" 21.8,55 r270 top
U17 "ZXCT1022" SOT23-5 10.795,48.26 r90 top
U18 "TSR 1-2450" "TSR-1 Series" 21.8,38.2 r270 top
U19 "PIC16F1516-E/SO" MCHP-SOIC-SO28_N 45.67,32.88 r0 top
U20 "TMH2405D" "TMH2 Dual output" 87.5,8.75 r0 top
U21 "OPA2228PAG4" TI-P8 70.96,77.49 r0 bottom
Y1 "8MHz" CRYSTAL_HC49-US-SM 82,61.2 r180 top

## Footprints (in the part's own frame and the unit in brackets; to place one, negate y for a bottom-side part, rotate by r counter-clockwise, add the part's x,y. Pads: shape width x height; smd on the part's side, far side on the other; paste and mask are expansions set on the pad)
1206 [mil]
  rect 60x60 smd: 1(0,0) 2(135,0)
  silkscreen extent -39,-39 173,39
"1206 - LED" [mm]
  rect 1.2x1.4 smd paste+0.2: A(-1.5,0) K(1.5,0)
  silkscreen extent -2.4,-1.04 2.4,1.02
95009-2667 [mm] "Connector; PCB Jack, Thru-Hole; 1-Port, 6 Positions, 6 Loaded; Unshielded without Lightpipes; Right Angle"
  rect 1.5x1.5 hole 0.9: 1(-3.175,19.61)
  round 1.5 hole 0.9: 2(-1.905,17.07) 3(-0.635,19.61) 4(0.635,17.07) 5(1.905,19.61) 6(3.175,17.07)
  round 2.95 hole 3.25: MH1(-5.08,10.72) MH2(5.08,10.72)
  silkscreen extent -6.6,0 6.6,20.57, body extent -6.6,0.04 6.61,20.61, height 14.99
ADI-N-8 [mm] "DIP, 8-Leads, Body 9.59x6.6mm, Pitch 2.54mm"
  rect 1.5x1.5 hole 0.9: 1(-3.81,3.81)
  round 1.5 hole 0.9: 2(-3.81,1.27) 3(-3.81,-1.27) 4(-3.81,-3.81) 5(3.81,-3.81) 6(3.81,-1.27) 7(3.81,1.27) 8(3.81,3.81)
  silkscreen extent -3.94,-5.1 2.65,5.23, body extent -3.95,-5.07 3.95,5.07, height 5.33
AXIAL-0.4 [mm] "Axial Device, Thru-Hole; 2 Leads; 0.4 in Pin Spacing"
  round 1.4 hole 0.85: 1(-5.08,0) 2(5.08,0)
  silkscreen extent -4.06,-1.02 4.06,1.02
CAPC0603(1608)100_N [mm] "Chip Capacitor, Body 1.6x0.8mm, Height 1.0mm, IPC Medium Density"
  rect 0.9x1 smd: 1(-0.8,0) 2(0.8,0)
  silkscreen extent -0.05,-0.4 0.05,0.4, body extent -0.87,-0.48 0.88,0.47, height 1
CAPC0805(2012)75_L [mm] "Chip Capacitor, Body 2.0x1.2mm, Height 0.75mm, IPC High Density"
  rect 0.95x1.35 smd: 1(-0.8,0) 2(0.8,0)
  silkscreen extent -0.05,-0.58 0.05,0.58, body extent -1.1,-0.72 1.1,0.73, height 0.75
CAPC0805(2012)75_M [mm] "Chip Capacitor, Body 2.0x1.2mm, Height 0.75mm, IPC Low Density"
  rect 1.35x1.55 smd: 1(-1,0) 2(1,0)
  silkscreen extent -0.05,-0.67 0.05,0.67, body extent -1.1,-0.73 1.1,0.72, height 0.75
CAPC0805(2012)75_N [mm] "Chip Capacitor, Body 2.0x1.2mm, Height 0.75mm, IPC Medium Density"
  rect 1.15x1.45 smd: 1(-0.9,0) 2(0.9,0)
  silkscreen extent -0.05,-0.63 0.05,0.63, body extent -1.1,-0.72 1.1,0.73, height 0.75
CAPC0805(2012)100_M [mm] "Chip Capacitor, Body 2.0x1.2mm, Height 1.0mm, IPC Low Density"
  rect 1.35x1.55 smd: 1(-1,0) 2(1,0)
  silkscreen extent -0.05,-0.67 0.05,0.68, body extent -1.1,-0.72 1.1,0.72, height 1
CAPC0805(2012)100_N [mm] "Chip Capacitor, Body 2.0x1.2mm, Height 1.0mm, IPC Medium Density"
  rect 1.15x1.45 smd: 1(-0.9,0) 2(0.9,0)
  silkscreen extent -0.05,-0.62 0.05,0.63, body extent -1.1,-0.72 1.1,0.73, height 1
CAPC0805(2012)145_M [mm] "Chip Capacitor, Body 2.0x1.2mm, Height 1.45mm, IPC Low Density"
  rect 1.35x1.55 smd: 1(-1,0) 2(1,0)
  silkscreen extent -0.05,-0.67 0.05,0.67, body extent -1.1,-0.72 1.1,0.72, height 1.45
CAPC0805(2012)145_N#1 [mm] "Chip Capacitor, Body 2.0x1.2mm, Height 1.45mm, IPC Medium Density"
  rect 1.15x1.45 smd: 1(-0.9,0) 2(0.9,0)
  silkscreen extent -0.05,-0.63 0.05,0.62, body extent -1.1,-0.72 1.1,0.73, height 1.45
CAPC0805(2012)145_N#2 [mm] "Chip Capacitor, Body 2.0x1.2mm, Height 1.45mm, IPC Medium Density"
  rect 1.15x1.45 smd: 1(0.9,0) 2(-0.9,0)
  silkscreen extent -0.05,-0.62 0.05,0.62, body extent -1.1,-0.73 1.1,0.72, height 1.45
CAPC1206(3216)170_L [mm] "Chip Capacitor, Body 3.2x1.6mm, Height 1.7mm, IPC High Density"
  rect 0.95x1.7 smd: 1(-1.4,0) 2(1.4,0)
  silkscreen extent -0.55,-0.75 0.55,0.75, body extent -1.7,-0.9 1.7,0.9, height 1.7
CAPC2220(5750)230_N [mm] "Chip Capacitor, Body 5.7x5.0mm, Height 2.3mm, IPC Medium Density"
  rect 1.55x5.4 smd: 1(-2.625,0) 2(2.625,0)
  silkscreen extent -1.45,-2.6 1.45,2.6, body extent -3.05,-2.7 3.05,2.7, height 2.3
CRYSTAL_HC49-US-SM [mm] "SMD Crystal HC49/US-SM package"
  round 0.508 on Mech15: 0(0,0)
  rrect25% 5.5x1.5 smd: 1(-4.25,0) 2(4.25,0)
  silkscreen extent -5.84,-2.41 5.84,2.41, body extent -6.4,-2.41 6.4,2.42, height 4.29
DIOD-S1M-13-F-SMA-2_V [mm] "SMD, 2-Leads, Body 4.3x2.605mm, Height 2.3mm"
  rect 2.5x1.7 smd: 1(-2,0) 2(2,0)
  silkscreen extent -2.15,-2.03 2.15,1.3, body extent -2.15,-1.3 2.15,1.3, height 2.3
HDR1X2 [mm] "Connector; Header; 2 Position"
  rect 1.5x1.5 hole 0.9: 1(0,0)
  round 1.5 hole 0.9: 2(2.54,0)
  silkscreen extent -1.27,-1.27 3.81,1.27
HDR1X6 [mm] "Connector; Header; 6 Position"
  rect 1.5x1.5 hole 0.9: 1(0,0)
  round 1.5 hole 0.9: 2(2.54,0) 3(5.08,0) 4(7.62,0) 5(10.16,0) 6(12.7,0)
  silkscreen extent -1.27,-1.27 13.97,1.27
HDR2X10 [mm] "Connector; Header; 10x2 Position"
  rect 1.5x1.5 hole 0.9: 1(0,0)
  round 1.5 hole 0.9: 2(0,2.54) 3(2.54,0) 4(2.54,2.54) 5(5.08,0) 6(5.08,2.54) 7(7.62,0) 8(7.62,2.54) 9(10.16,0) 10(10.16,2.54) 11(12.7,0) 12(12.7,2.54) 13(15.24,0) 14(15.24,2.54) 15(17.78,0) 16(17.78,2.54) 17(20.32,0) 18(20.32,2.54) 19(22.86,0) 20(22.86,2.54)
  silkscreen extent -1.27,-1.27 24.13,3.81
MCHP-SOIC-SO28_N [mm] "SOIC, 28-Leads, Body 17.9x7.5mm, Pitch 1.27mm, IPC Medium Density"
  oval 2.05x0.6 smd: 1(-4.6,8.255) 2(-4.6,6.985) 3(-4.6,5.715) 4(-4.6,4.445) 5(-4.6,3.175) 6(-4.6,1.905) 7(-4.6,0.635) 8(-4.6,-0.635) 9(-4.6,-1.905) 10(-4.6,-3.175) 11(-4.6,-4.445) 12(-4.6,-5.715) 13(-4.6,-6.985) 14(-4.6,-8.255) 15(4.6,-8.255) 16(4.6,-6.985) 17(4.6,-5.715) 18(4.6,-4.445) 19(4.6,-3.175) 20(4.6,-1.905) 21(4.6,-0.635) 22(4.6,0.635) 23(4.6,1.905) 24(4.6,3.175) 25(4.6,4.445) 26(4.6,5.715) 27(4.6,6.985) 28(4.6,8.255)
  silkscreen extent -4.73,-8.95 3.18,9.23, body extent -3.75,-8.95 3.75,8.95, height 2.65
"MOLEX SL 2W Vertical with latch" [mm]
  rect 2x2.5 hole 1.1: 1(0,0)
  oval 2x2.5 hole 1.1: 2(-2.54,0)
  silkscreen extent -5.08,-2.54 2.54,3.81
"MOLEX SL 3W Vertical with latch" [mm]
  rect 2x2.5 hole 1.1: 1(0,0)
  oval 2x2.5 hole 1.1: 2(-2.54,0) 3(-5.08,0)
  silkscreen extent -7.62,-2.54 2.54,3.81
"MOLEX SL 4W Vertical with latch" [mm]
  rect 2x2.5 hole 1.1: 1(0,0)
  oval 2x2.5 hole 1.1: 2(-2.54,0) 3(-5.08,0) 4(-7.62,0)
  silkscreen extent -10.16,-2.54 2.54,3.81
"MOLEX SL 5W Vertical with latch" [mm]
  rect 2x2.5 hole 1.1: 1(0,0)
  oval 2x2.5 hole 1.1: 2(-2.54,0) 3(-5.08,0) 4(-7.62,0) 5(-10.16,0)
  silkscreen extent -12.7,-2.54 2.54,3.81
RESC0805(2012)_L [mm] "Chip Resistor, Body 2.0x1.3mm, IPC High Density"
  rect 0.85x1.3 smd: 1(-0.85,0) 2(0.85,0)
  silkscreen extent -0.05,-0.55 0.05,0.55, body extent -1.1,-0.67 1.1,0.68, height 0.7
RESC0805(2012)_M [mm] "Chip Resistor, Body 2.0x1.3mm, IPC Low Density"
  rect 1.25x1.5 smd: 1(-1.05,0) 2(1.05,0)
  silkscreen extent -0.05,-0.65 0.05,0.65, body extent -1.1,-0.67 1.1,0.67, height 0.7
RESC0805(2012)_N [mm] "Chip Resistor, Body 2.0x1.3mm, IPC Medium Density"
  rect 1.05x1.4 smd: 1(-0.95,0) 2(0.95,0)
  silkscreen extent -0.05,-0.6 0.05,0.6, body extent -1.1,-0.67 1.1,0.68, height 0.7
RXEF040 [mm]
  round 3 / inner round 1.2 / far side round 3 hole 1: 1(0,0) 2(5.08,0)
  silkscreen extent -1.21,-1.5 6.29,1.5
"SMA Vertical" [mm]
  round 3 hole 1.5: 1(0,0)
  round 3 hole 1.6: 2(2.54,2.54) 3(-2.54,-2.54) 4(2.54,-2.54) 5(-2.54,2.54)
  silkscreen extent -3.2,-3.2 3.2,3.2
SOP65P800X200-28N [mm] "SOP, 28-Leads, Body 10.20x5.30mm, Pitch 0.65mm, IPC Medium Density"
  oval 1.9x0.45 smd: 1(-3.55,4.225) 2(-3.55,3.575) 3(-3.55,2.925) 4(-3.55,2.275) 5(-3.55,1.625) 6(-3.55,0.975) 7(-3.55,0.325) 8(-3.55,-0.325) 9(-3.55,-0.975) 10(-3.55,-1.625) 11(-3.55,-2.275) 12(-3.55,-2.925) 13(-3.55,-3.575) 14(-3.55,-4.225) 15(3.55,-4.225) 16(3.55,-3.575) 17(3.55,-2.925) 18(3.55,-2.275) 19(3.55,-1.625) 20(3.55,-0.975) 21(3.55,-0.325) 22(3.55,0.325) 23(3.55,0.975) 24(3.55,1.625) 25(3.55,2.275) 26(3.55,2.925) 27(3.55,3.575) 28(3.55,4.225)
  silkscreen extent -3.68,-5.25 2.2,5.25, body extent -2.8,-5.25 2.8,5.25, height 2
SOT23-5 [mm]
  round 0.5 on Mech15: 0(0,0)
  rrect25% 1x0.6 smd: 1(-1.3,0.95) 2(-1.3,0) 3(-1.3,-0.95) 4(1.3,-0.95) 5(1.3,0.95)
  silkscreen extent -0.51,-1.35 0.51,1.35, body extent -1.4,-1.45 1.4,1.45, height 1.44
SOT-23-TT3_M [mm] "SOT23, 3-Leads, Body 2.9x1.3mm, Pitch 0.95mm, Lead Span 2.4mm, IPC Low Density"
  rect 1.8x0.6 smd: 1(-1,0.95) 2(-1,-0.95) 3(1,0)
  silkscreen extent -1.13,-1.55 0.7,1.92, body extent -0.7,-1.52 0.7,1.53, height 1.12
SOT-223-DB3_L [mm] "SOT223, 4-Leads, Body 6.5x3.5mm, Pitch 2.3mm, Lead Span 7mm, IPC High Density"
  rect 1.9x0.9 smd: 1(-2.95,2.3) 2(-2.95,0) 3(-2.95,-2.3)
  rect 1.9x3.2 smd: 4(2.95,0)
  silkscreen extent -3.08,-3.35 1.7,3.42, body extent -1.85,-3.35 1.85,3.35, height 1.8
TI-D8_N [mm] "SOIC, 8-Leads, Body 4.9x3.9mm, Pitch 1.27mm, IPC Medium Density"
  oval 2.2x0.6 smd: 1(-2.4,1.905) 2(-2.4,0.635) 3(-2.4,-0.635) 4(-2.4,-1.905) 5(2.4,-1.905) 6(2.4,-0.635) 7(2.4,0.635) 8(2.4,1.905)
  silkscreen extent -2.52,-2.5 0.9,2.88, body extent -2,-2.5 2,2.5, height 1.75
TI-DB28_M [mm] "SOP, 28-Leads, Body 10.2x5.3mm, Pitch 0.65mm, IPC Low Density"
  oval 2.4x0.45 smd: 1(-3.5,4.225) 2(-3.5,3.575) 3(-3.5,2.925) 4(-3.5,2.275) 5(-3.5,1.625) 6(-3.5,0.975) 7(-3.5,0.325) 8(-3.5,-0.325) 9(-3.5,-0.975) 10(-3.5,-1.625) 11(-3.5,-2.275) 12(-3.5,-2.925) 13(-3.5,-3.575) 14(-3.5,-4.225) 15(3.5,-4.225) 16(3.5,-3.575) 17(3.5,-2.925) 18(3.5,-2.275) 19(3.5,-1.625) 20(3.5,-0.975) 21(3.5,-0.325) 22(3.5,0.325) 23(3.5,0.975) 24(3.5,1.625) 25(3.5,2.275) 26(3.5,2.925) 27(3.5,3.575) 28(3.5,4.225)
  silkscreen extent -3.62,-5.25 1.9,5.25, body extent -2.8,-5.25 2.8,5.25, height 2
TI-P8 [mm] "DIP, 8-Leads, Body 9.59x6.35mm, Pitch 2.54mm"
  rect 1.5x1.5 hole 0.9: 1(-3.81,3.81)
  round 1.5 hole 0.9: 2(-3.81,1.27) 3(-3.81,-1.27) 4(-3.81,-3.81) 5(3.81,-3.81) 6(3.81,-1.27) 7(3.81,1.27) 8(3.81,3.81)
  silkscreen extent -3.94,-5.1 2.65,5.23, body extent -3.95,-5.07 3.95,5.07, height 5.08
"TMH2 Dual output" [mm]
  round 1.8 hole 0.6: 1(2.3,-1.25) 2(4.84,-1.25) 4(9.92,-1.25) 5(12.46,-1.25) 6(15,-1.25)
  silkscreen extent 0,-7.5 19.5,0
TQFP-PF100_L [mm] "Thin QFP, 100-Leads, Body 14x14mm, Pitch 0.5mm, IPC High Density"
  oval 1.55x0.25 smd: 1(-7.525,6) 2(-7.525,5.5) 3(-7.525,5) 4(-7.525,4.5) 5(-7.525,4) 6(-7.525,3.5) 7(-7.525,3) 8(-7.525,2.5) 9(-7.525,2) 10(-7.525,1.5) 11(-7.525,1) 12(-7.525,0.5) 13(-7.525,0) 14(-7.525,-0.5) 15(-7.525,-1) 16(-7.525,-1.5) 17(-7.525,-2) 18(-7.525,-2.5) 19(-7.525,-3) 20(-7.525,-3.5) 21(-7.525,-4) 22(-7.525,-4.5) 23(-7.525,-5) 24(-7.525,-5.5) 25(-7.525,-6) 51(7.525,-6) 52(7.525,-5.5) 53(7.525,-5) 54(7.525,-4.5) 55(7.525,-4) 56(7.525,-3.5) 57(7.525,-3) 58(7.525,-2.5) 59(7.525,-2) 60(7.525,-1.5) 61(7.525,-1) 62(7.525,-0.5) 63(7.525,0) 64(7.525,0.5) 65(7.525,1) 66(7.525,1.5) 67(7.525,2) 68(7.525,2.5) 69(7.525,3) 70(7.525,3.5) 71(7.525,4) 72(7.525,4.5) 73(7.525,5) 74(7.525,5.5) 75(7.525,6)
  oval 0.25x1.55 smd: 26(-6,-7.525) 27(-5.5,-7.525) 28(-5,-7.525) 29(-4.5,-7.525) 30(-4,-7.525) 31(-3.5,-7.525) 32(-3,-7.525) 33(-2.5,-7.525) 34(-2,-7.525) 35(-1.5,-7.525) 36(-1,-7.525) 37(-0.5,-7.525) 38(0,-7.525) 39(0.5,-7.525) 40(1,-7.525) 41(1.5,-7.525) 42(2,-7.525) 43(2.5,-7.525) 44(3,-7.525) 45(3.5,-7.525) 46(4,-7.525) 47(4.5,-7.525) 48(5,-7.525) 49(5.5,-7.525) 50(6,-7.525) 76(6,7.525) 77(5.5,7.525) 78(5,7.525) 79(4.5,7.525) 80(4,7.525) 81(3.5,7.525) 82(3,7.525) 83(2.5,7.525) 84(2,7.525) 85(1.5,7.525) 86(1,7.525) 87(0.5,7.525) 88(0,7.525) 89(-0.5,7.525) 90(-1,7.525) 91(-1.5,7.525) 92(-2,7.525) 93(-2.5,7.525) 94(-3,7.525) 95(-3.5,7.525) 96(-4,7.525) 97(-4.5,7.525) 98(-5,7.525) 99(-5.5,7.525) 100(-6,7.525)
  silkscreen extent -7.65,-6.35 6.35,6.8, body extent -7,-7 7,7, height 1.6
"TSR-1 Series" [mm]
  round 1.8 hole 0.6: 1(8.38,-2) 2(5.84,-2) 3(3.3,-2)
  silkscreen extent 0,-7.6 11.7,0